# Altium PCB PCB1.PcbDoc
Units mm, origin at the board's own origin, x right, y up, seen from the top; angles counter-clockwise.
Board outline 60 x 60 mm, 2 copper layers (Top Layer, Bottom Layer); 56 components, 40 nets, 259 pads, 34 vias.
Unrouted connection lines stored in the file: 49.
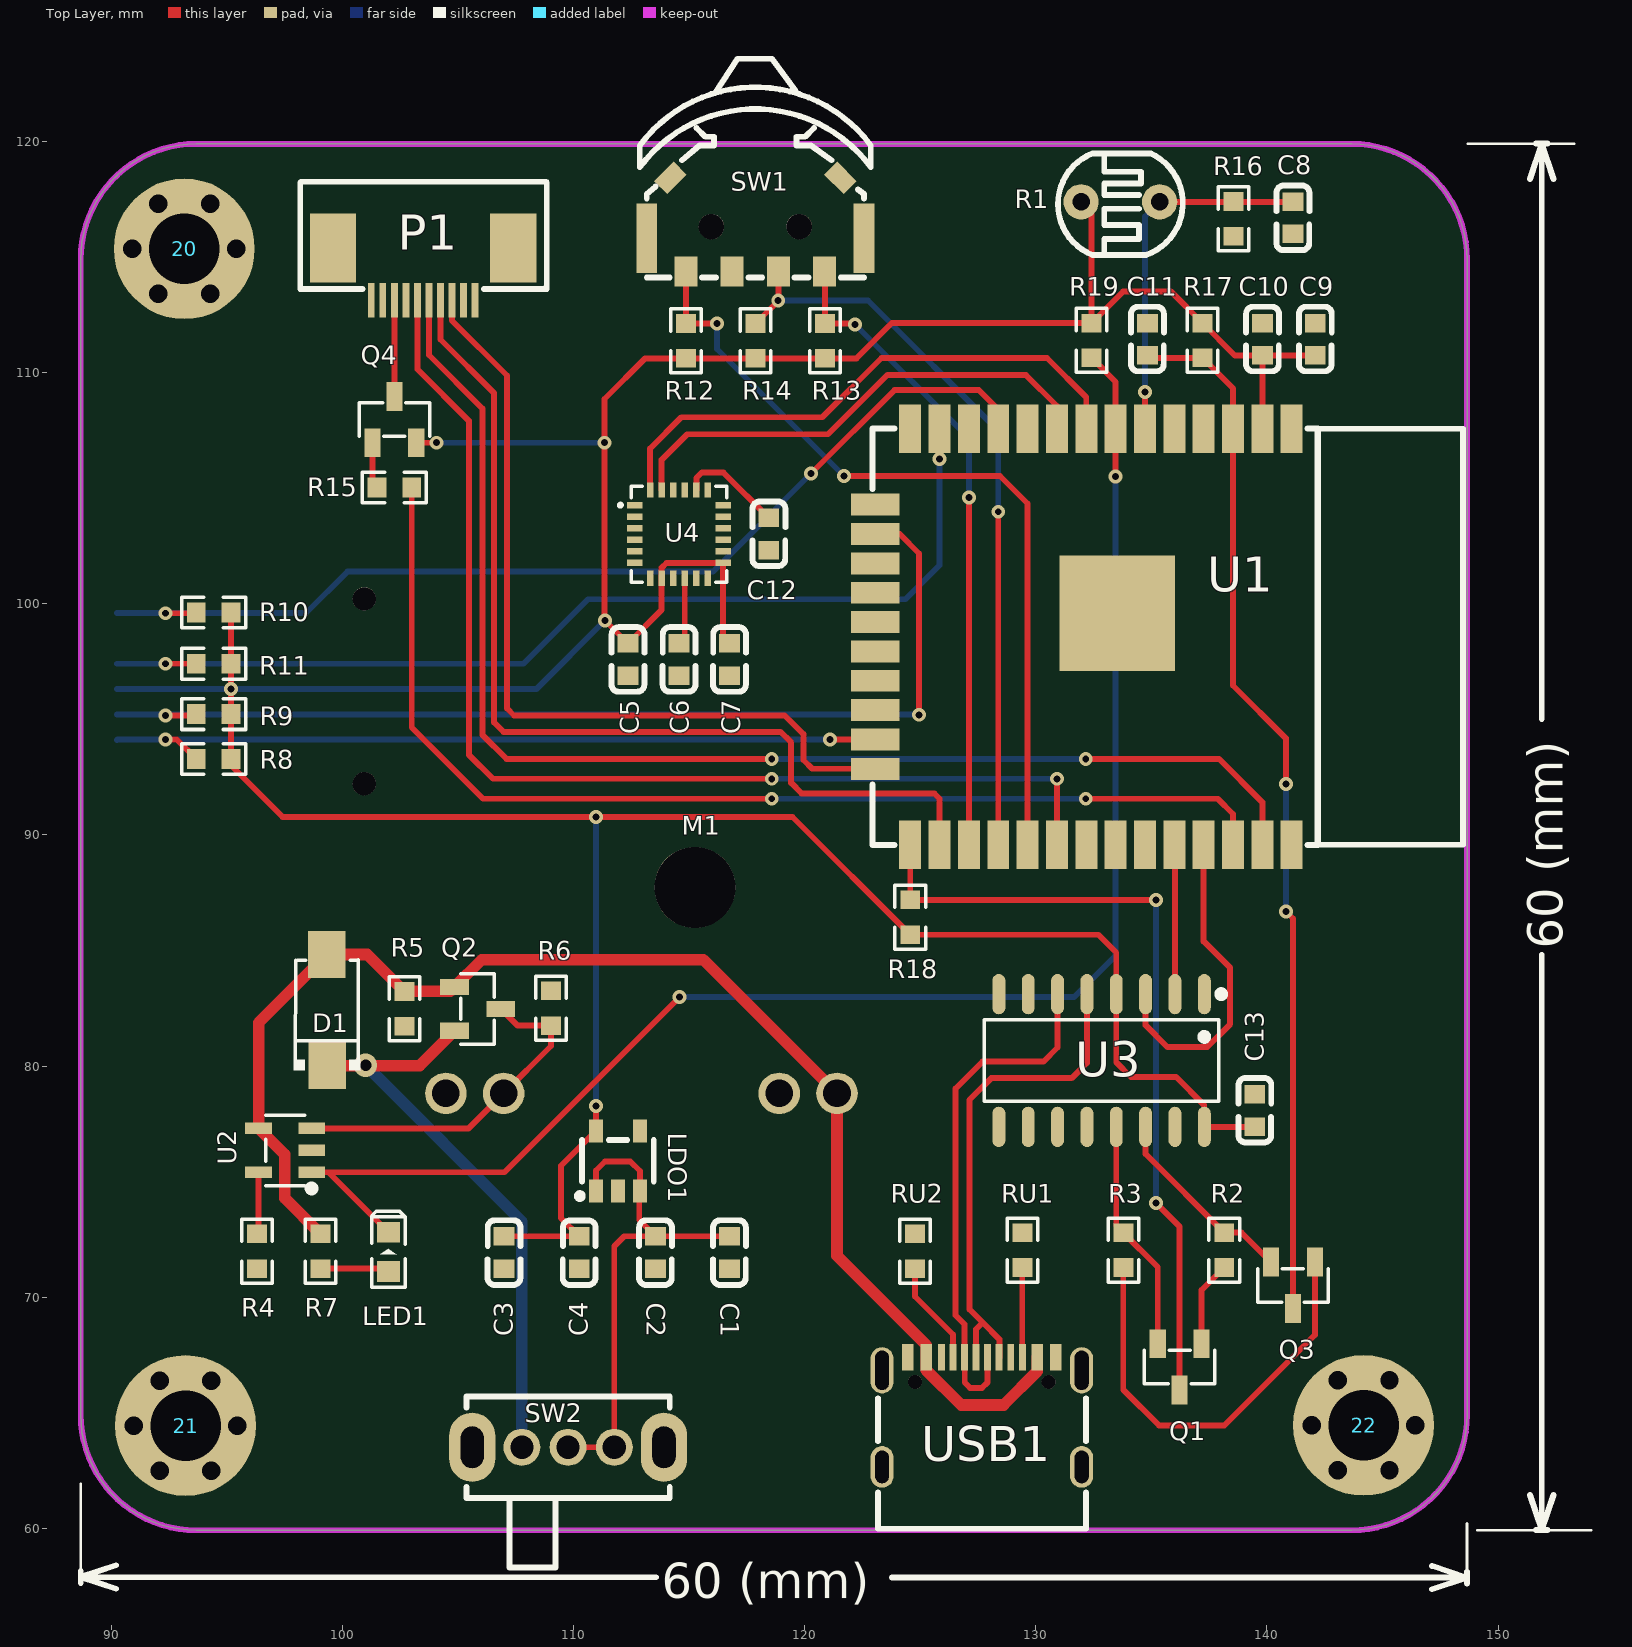
[diagram p0: Top Layer view]
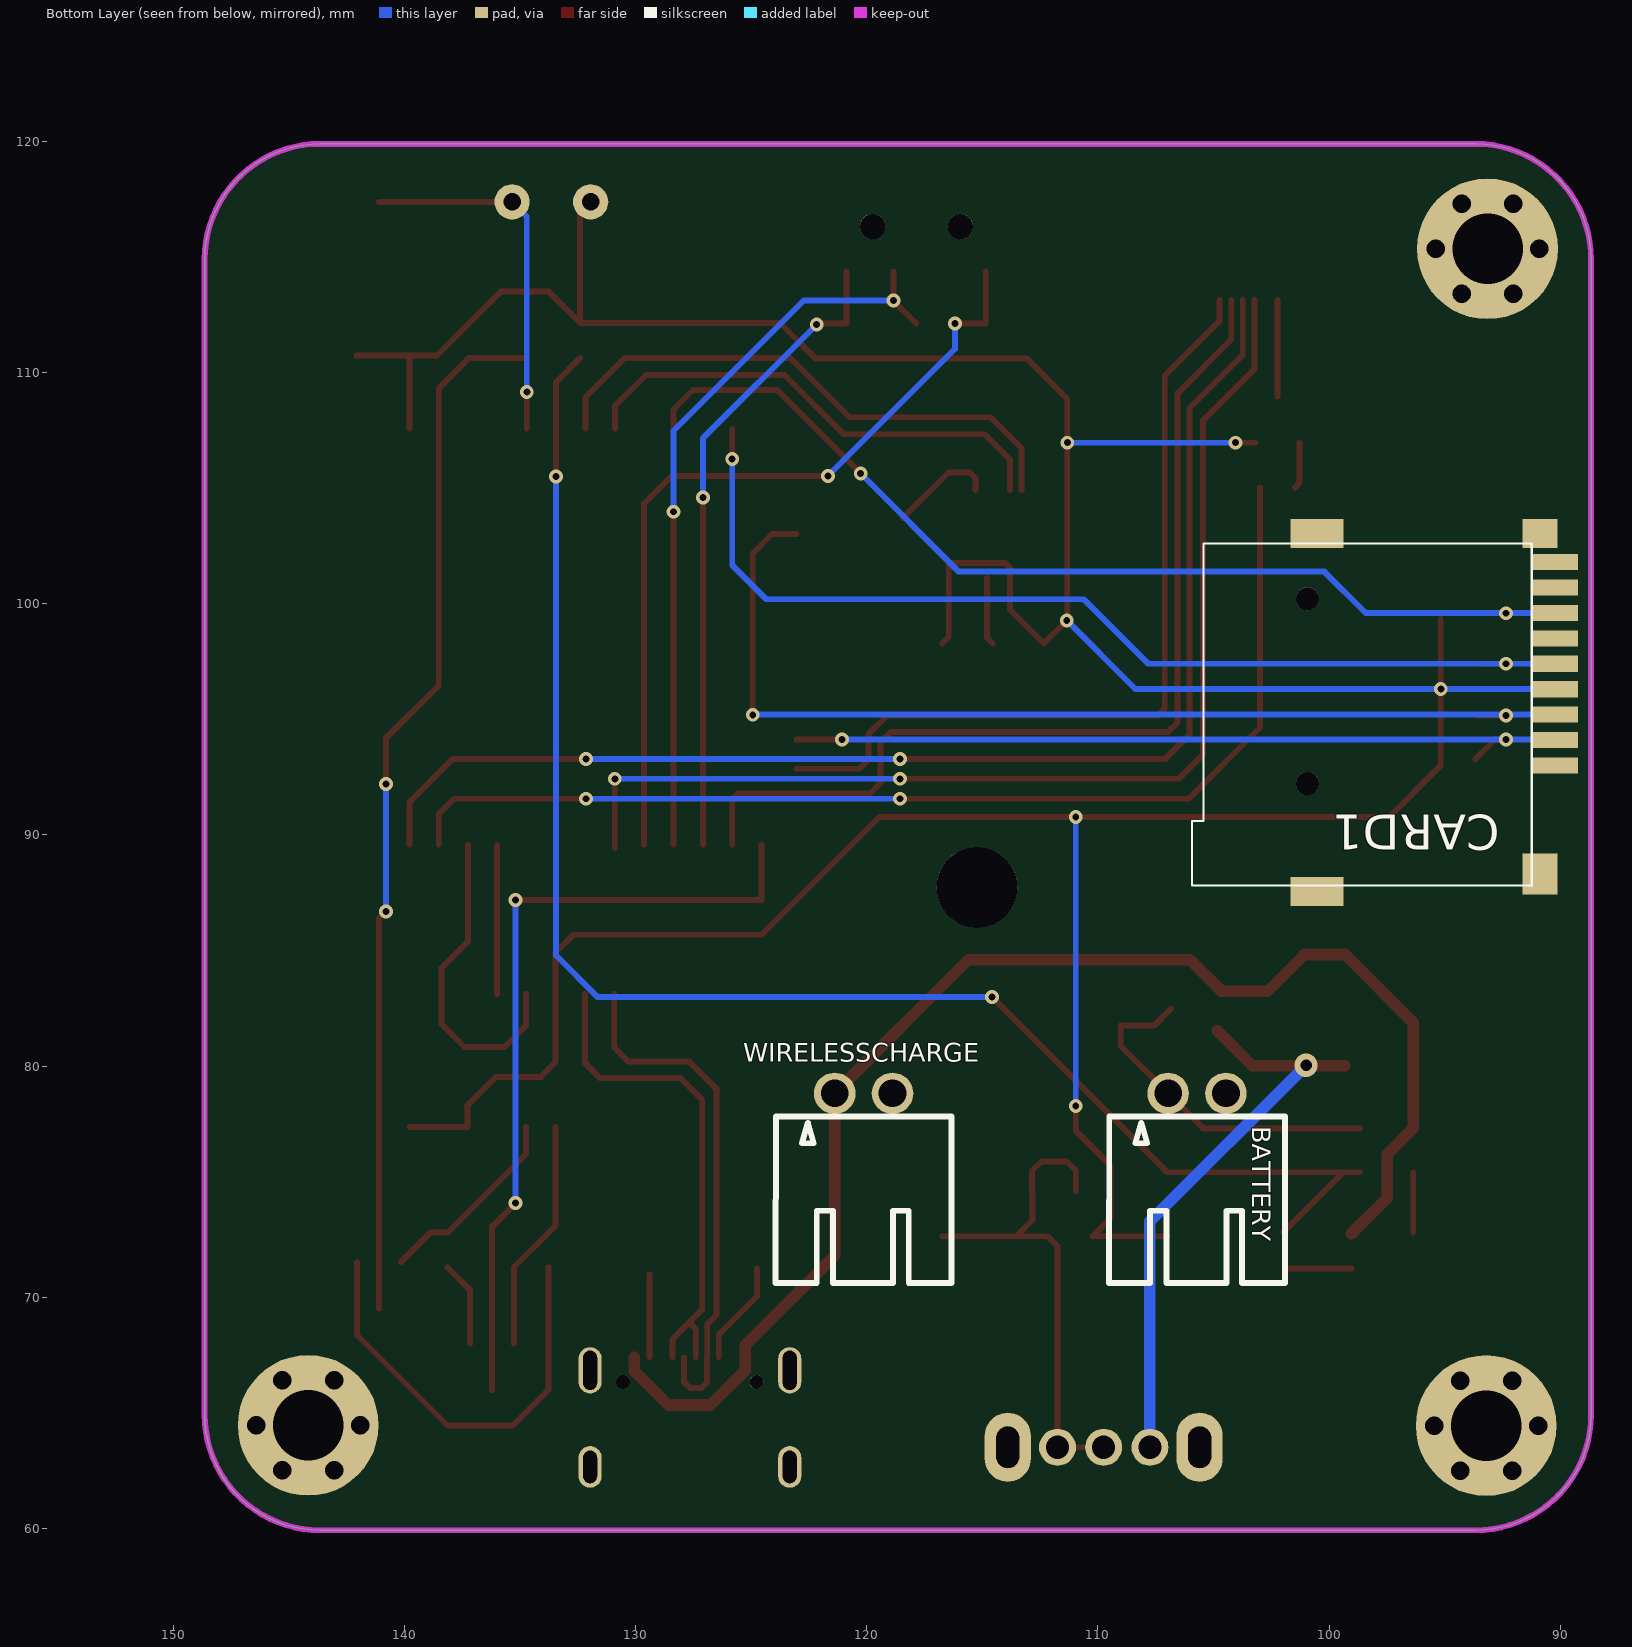
[diagram p1: Bottom Layer view, seen from below]

## Layer stack, top to bottom
Top Solder: solder mask 0.0102, Solder Resist, Dk 3.5
Top Layer: signal copper 0.0356
Dielectric 1: dielectric 0.32, FR-4, Dk 4.8
Bottom Layer: signal copper 0.0356
Bottom Solder: solder mask 0.0102, Solder Resist, Dk 3.5

## Board outline
88.661,64.909 ccw(c93.661,64.909) 93.661,59.909 143.661,59.909 ccw(c143.661,64.909) 148.661,64.909 148.661,114.909 ccw(c143.661,114.909) 143.661,119.909 93.661,119.909 ccw(c93.661,114.909) 88.661,114.909

## Design rules (kind name [scope] priority, off if disabled: settings)
Clearance Clearance_COMP [InComponent('USB1') Or InComponent('P1') Or InComponent('U4')] p1: gap=0.025
Clearance [All] p2: gap=0.254
PolygonConnect [All] p1: connectstyle=Relief reliefconductorwidth=0.254 reliefentries=4 polygonreliefangle="90 Angle" airgapwidth=0.254
RoutingVias [All] p1: holewidth=0.711 width=1.27 viastyle="Through Hole" minholewidth=0.711 minwidth=1.27 maxholewidth=0.711 maxwidth=1.27
SolderMaskExpansion [All] p1: expansion=0.102
Width [All] p1: maxlimit=1 minlimit=0.254 preferedwidth=0.254
30 further rules are at their usual default settings.

## Classes and differential pairs
component class ESP32花盆: BATTERY C1 C2 C3 C4 C5 C6 C7 C8 C9 C10 C11 C12 C13 CARD1 D1 LDO1 LED1 M1 P1 Q1 Q2 Q3 Q4 R1 R2 R3 R4 R5 R6 R7 R8 R9 R10 R11 R12 R13 R14 R15 R16 R17 R18 R19 RU1 RU2 SW1 SW2 U1 U2 U3 U4 USB1 WIRELESSCHARGE

## Components (designator, comment, footprint, x,y, rotation, side; value= is the part's Value field where it differs from the comment)
20 "Comment" 焊盘孔 93.142,115.367 r0 top locked
21 "Comment" 焊盘孔 93.199,64.435 r180 top locked
22 "Comment" 焊盘孔 144.18,64.451 r180 top locked
BATTERY "X8821WR-02S-N0SN" CONN-TH_X8821WR-02S-N0SN 105.715,78.816 r180 bottom
C1 "0.1u" C0603 116.738,71.933 r90 top
C2 "0.01u" C0603 113.538,71.933 r90 top
C3 "0.01u" C0603 106.985,71.933 r90 top
C4 "0.1u" C0603 110.236,71.928 r90 top
C5 "0.01u" C0603 112.344,97.587 r270 top
C6 "0.1u" C0603 114.554,97.587 r270 top
C7 "0.1u" C0603 116.738,97.587 r270 top
C8 "0.1u" C0603 141.122,116.713 r90 top
C9 "0.1u" C0603 142.088,111.455 r270 top
C10 "10u" C0603 139.802,111.455 r270 top
C11 "0.1u" C0603 134.823,111.455 r270 top
C12 "2.2nf" C0603 118.44,103.022 r270 top
C13 "0.1u" C0603 139.471,78.08 r270 top
CARD1 "HYC77-TF09-200" TF-SMD_HYC77-TF09-200 95.377,95.301 r90 bottom
D1 "SS54_C727065" SMA_L4.3-W2.6-LS5.0-RD 99.314,82.423 r90 top
LDO1 "ME6211C33M5G-N" SOT-23-5_L3.0-W1.7-P0.95-LS2.8-BR 111.912,75.895 r270 top
LED1 "LED-0603_R" LED0603_RED 101.981,71.958 r90 top
M1 "M3" M3 115.24,87.732 r0 top
P1 "FPC 0.5MM 10P Pull type H2.0mm Pick up" FPC-SMD_FPC0.5MM10P 103.48,114.275 r180 top
Q1 "S8050_C908252" SOT-23-3_L2.9-W1.3-P1.90-LS2.4-BR 136.22,66.98 r90 top
Q2 "AO3401" SOT-23-3_L2.9-W1.3-P1.90-LS2.4-BR 105.842,82.474 r180 top
Q3 "S8050_C908252" SOT-23-3_L2.9-W1.3-P1.90-LS2.4-BR 141.122,70.51 r90 top
Q4 "AO3401" SOT-23-3_L2.9-W1.3-P1.90-LS2.4-BR 102.235,107.975 r270 top
R1 "GL5528" RES-TH_L5.1-W4.3-P3.40-D0.5 133.655,117.399 r90 top
R2 "10k" R0603 138.151,72.034 r270 top
R3 "10k" R0603 133.782,72.034 r270 top
R4 "2k" R0603 96.291,71.984 r90 top
R5 "100k" R0603 102.667,82.474 r90 top
R6 "100k" R0603 109.017,82.499 r270 top
R7 "1k" R0603 99.035,71.984 r90 top
R8 "1k" R0603 94.412,93.294 r0 top
R9 "1k" R0603 94.412,95.225 r0 top
R10 "1k" R0603 94.412,99.619 r0 top
R11 "1k" R0603 94.412,97.409 r0 top
R12 "10K" R0603 114.859,111.379 r270 top
R13 "10K" R0603 120.879,111.379 r90 top
R14 "10K" R0603 117.869,111.379 r90 top
R15 "1k" R0603 102.235,105.029 r180 top
R16 "10k" R0603 138.557,116.662 r90 top
R17 "10k" R0603 137.211,111.399 r90 top
R18 "10k" R0603 124.562,86.436 r270 top
R19 "10k" R0603 132.41,111.399 r90 top
RU1 "5.1K" R0603 129.413,72.034 r270 top (schematic designator R12)
RU2 "5.1K" R0603 124.765,71.984 r90 top (schematic designator R12)
SW1 "TM-2023" SW-SMD_TM-2023-1 117.856,116.408 r0 top
SW2 "SK12D07VG3_C431547" SW-TH_SK12D07VG3 109.753,63.5 r0 top
U1 "ESP32-WROOM-32D" WIFIM-SMD_39P-L25.5-W18.0-P1.27-BL 132.055,98.577 r180 top
U2 "TP4054_C668215" SOT-23-5_L3.0-W1.7-P0.95-LS2.8-BL 97.511,76.352 r90 top
U3 "CH340C" SOP-16_L10.0-W3.9-P1.27-LS6.0-BL 132.842,80.239 r180 top
U4 "MPU-6050_C24112" QFN-24_L4.0-W4.0-P0.50-BL-MPU-6050 114.554,103.022 r270 top
USB1 "TYPE-C-31-M-31" USB-C-SMD_TYPE-C-31-M-31 127.66,65.024 r0 top
WIRELESSCHARGE "X8821WR-02S-N0SN" CONN-TH_X8821WR-02S-N0SN 120.142,78.816 r180 bottom

## Footprints (in the part's own frame and the unit in brackets; to place one, negate y for a bottom-side part, rotate by r counter-clockwise, add the part's x,y. Pads: shape width x height; smd on the part's side, far side on the other; paste and mask are expansions set on the pad)
C0603 [mm]
  rect 0.8x0.9 smd: 1(-0.7,0) 2(0.7,0)
  silkscreen extent -1.41,-0.71 1.39,0.72
CONN-TH_X8821WR-02S-N0SN [mm]
  round 1.8 hole 1.2: 1(-1.25,0) 2(1.25,0)
  silkscreen extent -3.81,-8.2 3.8,-1
FPC-SMD_FPC0.5MM10P [mm]
  rect 0.3x1.5 smd: 1(2.245,1.13) 2(1.746,1.13) 3(1.246,1.13) 4(0.746,1.13) 5(0.246,1.13) 6(-0.254,1.13) 7(-0.754,1.13) 8(-1.254,1.13) 9(-1.754,1.13) 10(-2.254,1.13)
  rect 2x3 smd: 11(-3.901,-1.13) 12(3.901,-1.124)
  silkscreen extent -5.35,-3.99 5.32,0.64
LED0603_RED [mm]
  rect 0.9x1 smd: 1(-0.85,0) 2(0.85,0)
  silkscreen extent -1.54,-0.73 1.75,0.73
M3 [mm]
  round 3.5 hole 3.5 unplated: ""(0,0)
  Top Layer pour cut-out: 0,-4.093 0.639,-4.042 1.263,-3.892 1.857,-3.647 2.404,-3.311 2.893,-2.894 3.31,-2.406 3.645,-1.858 3.891,-1.265 4.041,-0.64 4.091,0 4.041,0.64 3.891,1.265 3.645,1.858 3.31,2.406 2.893,2.894 2.404,3.311 1.857,3.647 1.263,3.892 0.639,4.042 -0.001,4.093 -0.641,4.042 -1.266,3.892 -1.859,3.647 -2.407,3.311 -2.895,2.894 -3.312,2.406 -3.648,1.858 -3.894,1.265 -4.044,0.64 -4.094,0 -4.044,-0.64 -3.894,-1.265 -3.648,-1.858 -3.312,-2.406 -2.895,-2.894 -2.407,-3.311 -1.859,-3.647 -1.266,-3.892 -0.641,-4.042 -0.003,-4.093 -0.003,-4.08
  Bottom Layer pour cut-out: 0,-4.077 0.639,-4.026 1.263,-3.876 1.857,-3.631 2.404,-3.295 2.893,-2.878 3.31,-2.39 3.645,-1.842 3.891,-1.249 4.041,-0.624 4.091,0.016 4.041,0.656 3.891,1.281 3.645,1.874 3.31,2.422 2.893,2.91 2.404,3.327 1.857,3.663 1.263,3.908 0.639,4.058 -0.001,4.109 -0.641,4.058 -1.266,3.908 -1.859,3.663 -2.407,3.327 -2.895,2.91 -3.312,2.422 -3.648,1.874 -3.894,1.281 -4.044,0.656 -4.094,0.016 -4.044,-0.624 -3.894,-1.249 -3.648,-1.842 -3.312,-2.39 -2.895,-2.878 -2.407,-3.295 -1.859,-3.631 -1.266,-3.876 -0.641,-4.026 -0.003,-4.077 -0.003,-4.064
QFN-24_L4.0-W4.0-P0.50-BL-MPU-6050 [mm]
  rect 0.28x0.665 smd: 1(-1.25,-1.907) 2(-0.75,-1.907) 3(-0.25,-1.907) 4(0.25,-1.907) 5(0.75,-1.907) 6(1.25,-1.907) 13(1.25,1.907) 14(0.75,1.907) 15(0.25,1.907) 16(-0.25,1.907) 17(-0.75,1.907) 18(-1.25,1.907)
  rect 0.665x0.28 smd: 7(1.907,-1.25) 8(1.907,-0.75) 9(1.907,-0.25) 10(1.907,0.25) 11(1.907,0.75) 12(1.907,1.25) 19(-1.907,1.25) 20(-1.907,0.75) 21(-1.907,0.25) 22(-1.907,-0.25) 23(-1.907,-0.75) 24(-1.907,-1.25)
  silkscreen extent -2.08,-2.61 2.08,2.08
R0603 [mm]
  rect 0.806x0.864 smd: 1(-0.753,0) 2(0.753,0)
  silkscreen extent -1.39,-0.66 1.39,0.66
RES-TH_L5.1-W4.3-P3.40-D0.5 [mil]
  round 60 hole 30: 1(0,66.93) 2(0,-66.93)
  silkscreen extent -91,-106 83,106
SMA_L4.3-W2.6-LS5.0-RD [mm]
  rect 2.046x1.62 smd: 1(-2.404,-0.009) 2(2.404,0.009)
  silkscreen extent -2.61,-1.44 2.16,1.44
SOP-16_L10.0-W3.9-P1.27-LS6.0-BL [mm]
  oval 0.56x1.745 smd: 1(-4.445,-2.873) 2(-3.175,-2.873) 3(-1.905,-2.873) 4(-0.635,-2.873) 5(0.635,-2.873) 6(1.905,-2.873) 7(3.175,-2.873) 8(4.445,-2.873) 9(4.445,2.873) 10(3.175,2.873) 11(1.905,2.873) 12(0.635,2.873) 13(-0.635,2.873) 14(-1.905,2.873) 15(-3.175,2.873) 16(-4.445,2.873)
  silkscreen extent -5.33,-3.02 5.08,1.77
SOT-23-3_L2.9-W1.3-P1.90-LS2.4-BR [mm]
  rect 1.25x0.7 smd: 1(1,-0.95) 2(1,0.95) 3(-1,0)
  silkscreen extent -0.73,-1.53 0.73,1.53
SOT-23-5_L3.0-W1.7-P0.95-LS2.8-BL [mm]
  rect 0.49x1.157 smd: 1(-0.95,-1.154) 2(0,-1.154) 3(0.95,-1.154)
  rect 0.49x1.175 smd: 4(0.95,1.154) 5(-0.95,1.154)
  silkscreen extent -1.8,-1.29 1.53,0.85
SOT-23-5_L3.0-W1.7-P0.95-LS2.8-BR [mm]
  rect 1x0.6 smd: 1(1.3,-0.95) 2(1.3,0) 3(1.3,0.95) 4(-1.3,0.95) 5(-1.3,-0.95)
  silkscreen extent -0.9,-1.78 1.65,1.55
SW-SMD_TM-2023-1 [mm]
  rect 1x1.3 smd: 1(-3,-2.03) 2(3,-2.03) C(-1,-2.03) T(1,-2.03)
  rect 0.9x3 smd: 3(-4.7,-0.58) 4(4.7,-0.58)
  rect 1.2x0.8 smd rot 135: 5(3.68,2.03)
  rect 1.2x0.8 smd rot 45: 6(-3.68,2.03)
  round 1.1 hole 1.1 unplated: ""(-1.9,-0.08) ""(1.9,-0.08)
  silkscreen extent -5,-2.28 5,7.19
SW-TH_SK12D07VG3 [mm]
  round 1.6 hole 1: 1(-2,0) 2(0,0) 3(2,0)
  oval 2x3 hole 1 slot 1.8 at 90 deg: 4(4.15,0) 5(-4.15,0)
  silkscreen extent -4.4,-5.2 4.4,2.2
TF-SMD_HYC77-TF09-200 [mm]
  rect 0.7x2 smd: 1(-2.292,-5.145) 2(-1.192,-5.143) 3(-0.093,-5.145) 4(1.008,-5.145) 5(2.108,-5.145) 6(3.208,-5.145) 7(4.307,-5.145) 8(5.407,-5.145) 9(6.507,-5.145)
  rect 1.27x1.5 smd: 10(7.747,-4.507)
  rect 1.27x2.286 smd: 11(7.747,5.145) 12(-7.747,5.145)
  rect 1.778x1.5 smd: 13(-6.985,-4.507)
  round 1 hole 1 unplated: ""(-3.084,5.554) ""(4.915,5.557)
  silkscreen extent -7.49,-4.15 7.32,10.56
USB-C-SMD_TYPE-C-31-M-31 [mm]
  oval 1x1.8 hole 0.6 slot 1.4 at 90 deg: 1(-4.32,-2.374) 1(4.32,-2.374)
  oval 1x2 hole 0.6 slot 1.7 at 90 deg: 1(-4.32,1.806) 1(4.32,1.806)
  rect 0.5x1.14 smd: A1(-3.2,2.373) A4(-2.4,2.373) A9(2.4,2.373) A12(3.2,2.373)
  rect 0.3x1.14 smd: A5(-1.25,2.373) A6(-0.25,2.373) A7(0.25,2.373) A8(1.25,2.374) B5(1.75,2.373) B6(0.75,2.373) B7(-0.75,2.373) B8(-1.75,2.374)
  round 0.6 hole 0.6 unplated: ""(-2.89,1.306) ""(2.89,1.306)
  silkscreen extent -4.5,-5.05 4.5,0.6
WIFIM-SMD_39P-L25.5-W18.0-P1.27-BL [mm]
  rect 0.95x2.1 smd: 1(-9.015,-9) 2(-7.745,-9) 3(-6.475,-9) 4(-5.205,-9) 5(-3.935,-9) 6(-2.665,-9) 7(-1.395,-9) 8(-0.125,-9) 9(1.145,-9) 10(2.415,-9) 11(3.685,-9) 12(4.955,-9) 13(6.225,-9) 14(7.495,-9) 25(7.495,9) 26(6.225,9) 27(4.955,9) 28(3.685,9) 29(2.415,9) 30(1.145,9) 31(-0.125,9) 32(-1.395,9) 33(-2.665,9) 34(-3.935,9) 35(-5.205,9) 36(-6.475,9) 37(-7.745,9) 38(-9.015,9)
  rect 2.1x0.95 smd: 15(9.015,-5.715) 16(9.015,-4.445) 17(9.015,-3.175) 18(9.015,-1.905) 19(9.015,-0.635) 20(9.015,0.635) 21(9.015,1.905) 22(9.015,3.175) 23(9.015,4.445) 24(9.015,5.715)
  rect 5x5 smd: 39(-1.472,-1.017)
  silkscreen extent -16.44,-9.02 9.12,9.02
焊盘孔 [mm]
  round 1.2 hole 0.8: 0(-2.243,0) 0(-1.122,-1.943) 0(-1.122,1.943) 0(1.122,-1.943) 0(1.122,1.943) 0(2.243,0)
  round 6.096 hole 3.048: 0(0,0)

## Part data
RU1 RU2: library part 100k

## Via types
v1: diameter 0.6, hole 0.3, Top Layer to Bottom Layer, tented both sides, 33 vias
v2: diameter 1, hole 0.5, Top Layer to Bottom Layer, tented both sides, 1 vias

## Nets (pads, with @x,y where several pads share a name; then routed paths per layer and width w, separated by ;. In a path a pad name is that pad's centre, name@x,y a point inside that pad or via, vN(x,y) a via of type N, cw(c..) or ccw(c..) an arc to the next point about the centre after c; other vN are vias at no path point)
+3.3V: C3.2 C4.2 C5.1 C7.1 C9.2 C10.2 C13.2 CARD1.4 LDO1.5 Q4.2 R1.1 R8.2 R9.2 R10.2 R11.2 R12.2 R13.1 R14.1 R17.2 R18.2 R19.2 U1.2 U3.4 U3.16 U4.8 U4.13 | length 177.3
  Top Layer w0.254: R10.2@95.165,99.339 R9.2 95.165,93.015 97.4,90.78 v1(110.963,90.78) 119.465,90.78 R18.2 132.706,85.683 133.477,84.912 U3.4 133.477,80.162 134.112,79.527 136.068,79.527 137.287,78.308 U3.16 C13.2@139.785,77.366 ; Q4.2 v1(104.054,106.975) ; C3.2@106.985,72.632 C4.2@110.231,72.632 ; C4.2 C4.2@110.231,72.632 ; v1(110.963,78.273) LDO1.5 109.449,75.681 109.449,73.415 C4.2@110.231,72.632 ; C7.1 116.461,98.564 U4.13 114.015,101.772 113.804,101.561 U4.8 113.804,99.746 C5.1 111.328,99.303 v1(111.328,106.975) 111.328,108.864 113.09,110.626 R12.2 R14.1 R13.1 122.234,110.626 123.761,112.153 R19.2 ; R1.1 132.41,116.943 R19.2 ; U1.2 139.8,110.754 138.61,110.754 R17.2 135.851,113.513 133.77,113.513 R19.2 ; C10.2 C9.2
  Bottom Layer w0.254: CARD1.4 108.374,96.309 v1(111.354,99.289) ; v1(104.054,106.975) v1(111.328,106.975) ; v1(110.963,78.273) v1(110.963,90.78)
  other v1: 95.165,96.317
+5V: D1.2 Q2.1 R5.2 R7.2 U2.4 USB1.A4 USB1.A9 WIRELESSCHARGE.1 | length 60.4
  Top Layer w0.5: R7.2 97.485,74.286 97.485,76.174 U2.4 96.357,81.879 D1.2 101.067,84.827 R5.2 104.645,83.227 Q2.1 106.025,84.607 115.601,84.607 WIRELESSCHARGE.1 121.392,71.793 125.26,67.925 USB1.A4 125.26,66.84 126.771,65.329 128.6,65.329 130.06,66.789 USB1.A9
BAT+: BATTERY.1 Q2.3 R6.2 U2.3 | length 15.2
  Top Layer w0.254: U2.3 105.451,77.302 BATTERY.1 109.017,80.868 R6.2 107.57,81.746 Q2.3
D+: U3.5 USB1.A6 USB1.B6 | length 22
  Top Layer w0.254: USB1.A6 127.41,68.609 127.686,68.885 127.711,68.885 ; USB1.B6@128.418,67.397 128.418,68.178 127.711,68.885 ; U3.5 132.207,80.137 131.547,79.477 128.067,79.477 127.127,78.537 127.127,69.469 127.711,68.885
D-: U3.6 USB1.A7 USB1.B7 | length 22.6
  Top Layer w0.254: USB1.B7 126.91,68.822 126.517,69.215 126.517,79.019 127.686,80.188 130.327,80.188 130.937,80.797 U3.6 ; USB1.B7@126.918,67.397 126.918,66.299 127.152,66.065 127.66,66.065 127.91,66.315 USB1.A7
DTR: Q1.2 R3.1 U3.13 | length 10.1
  Top Layer w0.254: U3.13 133.477,73.092 R3.1 135.27,71.299 Q1.2
GND: BATTERY.2 C1.1 C2.1 C3.1 C4.1 C5.2 C6.2 C7.2 C8.1 C9.1 C10.1 C11.1 C12.2 C13.1 CARD1.6 CARD1.9 CARD1.10 CARD1.11 CARD1.12 CARD1.13 LDO1.2 P1.1 P1.2 P1.4 P1.11 P1.12 R4.1 R5.1 R6.1 R16.1 RU1.1 RU2.2 SW1.3 SW1.4 SW1.5 SW1.6 SW1.C U1.1 U1.15 U1.38 U1.39 U2.2 U3.1 U4.1 U4.9 U4.11 U4.18 USB1.A1 USB1.A12 WIRELESSCHARGE.2
IO0: Q1.3 R18.1 U1.25 | length 34.7
  Top Layer w0.254: R18.1@124.56,87.191 U1.25 ; R18.1 v1(135.204,87.189) ; v1(135.204,74.066) 136.22,73.05 Q1.3
  Bottom Layer w0.254: v1(135.204,74.066) v1(135.204,87.189)
IO34: C8.2 R1.2 R16.2 U1.6 | length 15.8
  Top Layer w0.254: U1.6 v1(134.72,109.171) ; R1.2 C8.2@141.108,117.399
  Bottom Layer w0.254: v1(134.72,109.171) 134.72,116.764 R1.2
IO35: LED1.2 R19.1 U1.7 U2.1 | length 68.6
  Top Layer w0.254: U2.1 99.387,75.402 ; LED1.2 99.387,75.402 ; v1(114.579,82.982) 107,75.402 99.387,75.402 ; R19.1 133.45,109.607 U1.7 v1(133.45,105.513)
  Bottom Layer w0.254: v1(114.579,82.982) 131.648,82.982 133.45,84.783 v1(133.45,105.513)
KEY_1: R12.1 SW1.1 U1.29 | length 35.7
  Top Layer w0.254: SW1.1@114.859,114.378 R12.1 v1(116.196,112.132) ; v1(121.691,105.537) 128.448,105.537 129.64,104.345 U1.29
  Bottom Layer w0.254: v1(116.196,112.132) 116.196,111.032 v1(121.691,105.537)
KEY_2: R13.2 SW1.2 U1.27 | length 28.1
  Top Layer w0.254: SW1.2@120.879,114.378 R13.2 v1@122.132,112.132 ; U1.27 v1@127.1,104.597
  Bottom Layer w0.254: v1@122.149,112.116 v1(122.174,112.09) 127.102,107.163 v1(127.102,104.597)
KEY_OK: R14.2 SW1.T U1.28 | length 32.6
  Top Layer w0.254: R14.2 118.856,113.119 SW1.T ; U1.28 v1(128.37,103.988) v1@128.37,104.116
  Bottom Layer w0.254: v1(118.847,113.132) 122.733,113.132 128.37,107.495 v1(128.37,103.988)
LEDA: P1.3 Q4.3 | length 4.2
  Top Layer w0.254: Q4.3@102.234,108.977 P1.3
MPU_SCL: U1.9 U4.23 | length 21.5
  Top Layer w0.254: U4.23 113.804,106.235 114.91,107.34 121.006,107.34 123.571,109.906 129.564,109.906 130.91,108.56 U1.9
MPU_SDA: U1.8 U4.24 | length 24.4
  Top Layer w0.254: U4.24 113.304,106.725 114.656,108.077 120.752,108.077 123.317,110.642 130.48,110.642 132.18,108.942 U1.8
NetC1_2: C1.2 C2.2 LDO1.1 LDO1.3 SW2.2 SW2.3 | length 22.1
  Top Layer w0.254: SW2.2 SW2.3 111.753,72.206 112.18,72.633 C2.2 ; LDO1.1 110.962,75.479 111.354,75.87 112.446,75.87 112.862,75.453 LDO1.3 ; LDO1.3@112.831,74.595 112.831,73.339 C2.2 ; C1.2 C2.2
NetC6_1: C6.1 U4.10 | length 2.9
  Top Layer w0.254: C6.1 114.804,98.537 U4.10
NetC12_1: C12.1 U4.20 | length 4.6
  Top Layer w0.254: U4.20 115.304,105.449 115.545,105.689 116.473,105.689 C12.1
NetLED1_1: LED1.1 R7.1 | length 2.8
  Top Layer w0.254: R7.1 LED1.1@101.859,71.23
NetQ1_1: Q1.1 R2.2 | length 3.7
  Top Layer w0.254: Q1.1 137.17,70.301 R2.2
NetQ3_1: Q3.1 R3.2 | length 19
  Top Layer w0.254: R3.2 133.782,65.989 135.331,64.44 138.151,64.44 142.072,68.362 Q3.1
NetQ4_1: Q4.1 R15.2 | length 2
  Top Layer w0.254: Q4.1 101.285,105.226 R15.2
NetR4_2: R4.2 U2.5 | length 2.6
  Top Layer w0.254: R4.2@96.357,72.802 U2.5
NetRU1_2: RU1.2 USB1.B5 | length 3.6
  Top Layer w0.254: USB1.B5 RU1.2@129.41,70.97
NetRU2_1: RU2.1 USB1.A5 | length 4.5
  Top Layer w0.254: RU2.1 124.765,70.028 126.41,68.382 USB1.A5
RESET: C11.2 Q3.3 R17.1 U1.3 | length 45
  Top Layer w0.254: C11.2@134.932,110.646 R17.1 138.53,109.327 U1.3 138.53,96.471 140.818,94.183 v1(140.818,92.202) ; v1(140.818,86.69) 141.122,86.385 Q3.3
  Bottom Layer w0.254: v1(140.818,86.69) v1(140.818,92.202)
RTS: Q3.2 R2.1 U3.14 | length 8.5
  Top Layer w0.254: U3.14 134.747,76.191 R2.1 138.895,72.788 Q3.2
SD_CLK: CARD1.5 R11.1 U1.13 | length 44.6
  Top Layer w0.254: v1(92.338,97.409) R11.1 ; v1(125.83,106.274) U1.13
  Bottom Layer w0.254: CARD1.5 107.822,97.408 110.617,100.203 124.358,100.203 125.83,101.674 v1(125.83,106.274)
SD_CS: CARD1.2 R8.1 U1.23 | length 34.2
  Top Layer w0.254: v1(92.338,94.132) 92.82,94.132 R8.1 ; v1(121.082,94.132) U1.23
  Bottom Layer w0.254: CARD1.2 90.257,94.132 v1(92.338,94.132) ; 92.643,94.132 v1(121.082,94.132)
SD_MISO: CARD1.7 R10.1 U1.11 | length 44.6
  Top Layer w0.254: v1(92.338,99.593) R10.1@93.633,99.593 ; v1(120.269,105.639) 123.885,109.254 127.524,109.254 128.37,108.409 U1.11
  Bottom Layer w0.254: CARD1.7 98.414,99.608 100.203,101.397 116.027,101.397 v1(120.269,105.639)
SD_MOSI: CARD1.3 R9.1 U1.16 | length 45.2
  Top Layer w0.254: v1(92.338,95.174) R9.1@93.608,95.174 ; U1.16 124.104,103.022 124.943,102.184 v1(124.943,95.199)
  Bottom Layer w0.254: CARD1.3 v1@124.968,95.208
TFT_BK: R15.1 U1.36 | length 48.5
  Top Layer w0.254: R15.1 102.988,94.649 106.07,91.567 v1(118.567,91.567) ; v1(132.156,91.567) 137.871,91.567 138.53,90.908 U1.36
  Bottom Layer w0.254: 118.897,91.567 v1(132.156,91.567)
TFT_DC: P1.8 U1.24 | length 36.3
  Top Layer w0.254: P1.8 104.734,112.258 107.112,109.88 107.112,95.479 107.417,95.174 119.126,95.174 119.939,94.361 119.939,93.243 120.32,92.862 U1.24
TFT_MOSI: P1.6 U1.37 | length 56.6
  Top Layer w0.254: P1.6 103.734,110.769 106.045,108.458 106.045,94.336 107.086,93.294 v1(118.567,93.294) ; v1(132.156,93.294) 137.922,93.294 139.8,91.416 U1.37
  Bottom Layer w0.254: v1(118.567,93.294) 131.826,93.294 v1(132.156,93.294)
TFT_RST: P1.7 U1.26 | length 42.9
  Top Layer w0.254: P1.7 104.234,111.438 106.553,109.118 106.553,94.869 106.959,94.463 118.948,94.463 119.405,94.005 119.405,92.253 119.863,91.796 125.603,91.796 125.83,91.569 U1.26
TFT_SCLK: P1.5 U1.30 | length 49.5
  Top Layer w0.254: P1.5 103.234,110.152 105.461,107.925 105.461,93.472 106.502,92.431 v1@118.491,92.431 ; U1.30@130.912,89.435 v1(130.912,92.431)
  Bottom Layer w0.254: v1@118.491,92.431 v1(118.567,92.431) v1(130.912,92.431)
U0RXD: U1.34 U3.2 | length 6.4
  Top Layer w0.254: U3.2 U1.34@136.017,89.55
U0TXD: U1.35 U3.3 | length 14
  Top Layer w0.254: U3.3 134.747,81.763 135.687,80.823 137.414,80.823 138.405,81.813 138.405,84.252 137.26,85.397 U1.35
VCC: D1.1 Q2.2 SW2.1 | length 25.5
  Top Layer w0.5: D1.1 103.337,80.019 Q2.2
  Bottom Layer w0.5: v2(100.99,80.035) 107.753,73.272 SW2.1
pads on no net: 20.0 21.0 22.0 CARD1. CARD1.1 CARD1.8 LDO1.4 M1. P1.9 P1.10 SW1. SW2.4 SW2.5 U1.4 U1.5 U1.10 U1.12 U1.14 U1.17 U1.18 U1.19 U1.20 U1.21 U1.22 U1.31 U1.32 U1.33 U3.7 U3.8 U3.9 U3.10 U3.11 U3.12 U3.15 U4.2 U4.3 U4.4 U4.5 U4.6 U4.7 U4.12 U4.14 U4.15 U4.16 U4.17 U4.19 U4.21 U4.22 USB1. USB1.1 USB1.A8 USB1.B8

## Keep-outs
Keep-Out Layer:
  the board outline again, w0.254

## Silkscreen, mask and mechanical layers (free items; w line width, h text height)
Top Overlay:
  lines w0.12: 88.661,57.887 88.661,61.925 ; 148.661,57.861 148.661,60.198 ; 148.692,119.909 153.289,119.909 ; 149.098,59.909 154.026,59.909
  lines w0.254: 88.661,57.633 88.661,58.141 ; 90.185,57.378 88.661,57.887 ; 90.185,58.394 88.661,57.887 ; 113.557,57.876 88.661,57.887 ; 123.765,57.872 148.661,57.861 ; 147.137,57.354 148.661,57.861 ; 147.137,58.37 148.661,57.861 ; 148.661,57.607 148.661,58.115 ; 151.384,61.442 151.892,59.918 ; 151.384,118.394 151.892,119.918 ; 151.638,59.918 152.146,59.918 ; 151.638,119.918 152.146,119.918 ; 151.892,84.814 151.892,59.918 ; 151.892,95.021 151.892,119.918 ; 152.4,61.442 151.892,59.918 ; 152.4,118.394 151.892,119.918
  text "60 (mm)" at 152.806,85.068 h1.52 r90
  text "60 (mm)" at 113.811,56.962 h1.52 r359.98